# Altium PCB POKERKIDV1TESTBOARD.PcbDoc
Units mm, origin at the board's own origin, x right, y up, seen from the top; angles counter-clockwise.
Board outline 47.37 x 32.51 mm, 2 copper layers (Top Layer, Bottom Layer); 24 components, 14 nets, 76 pads, 0 vias.
Unrouted connection lines stored in the file: 2.
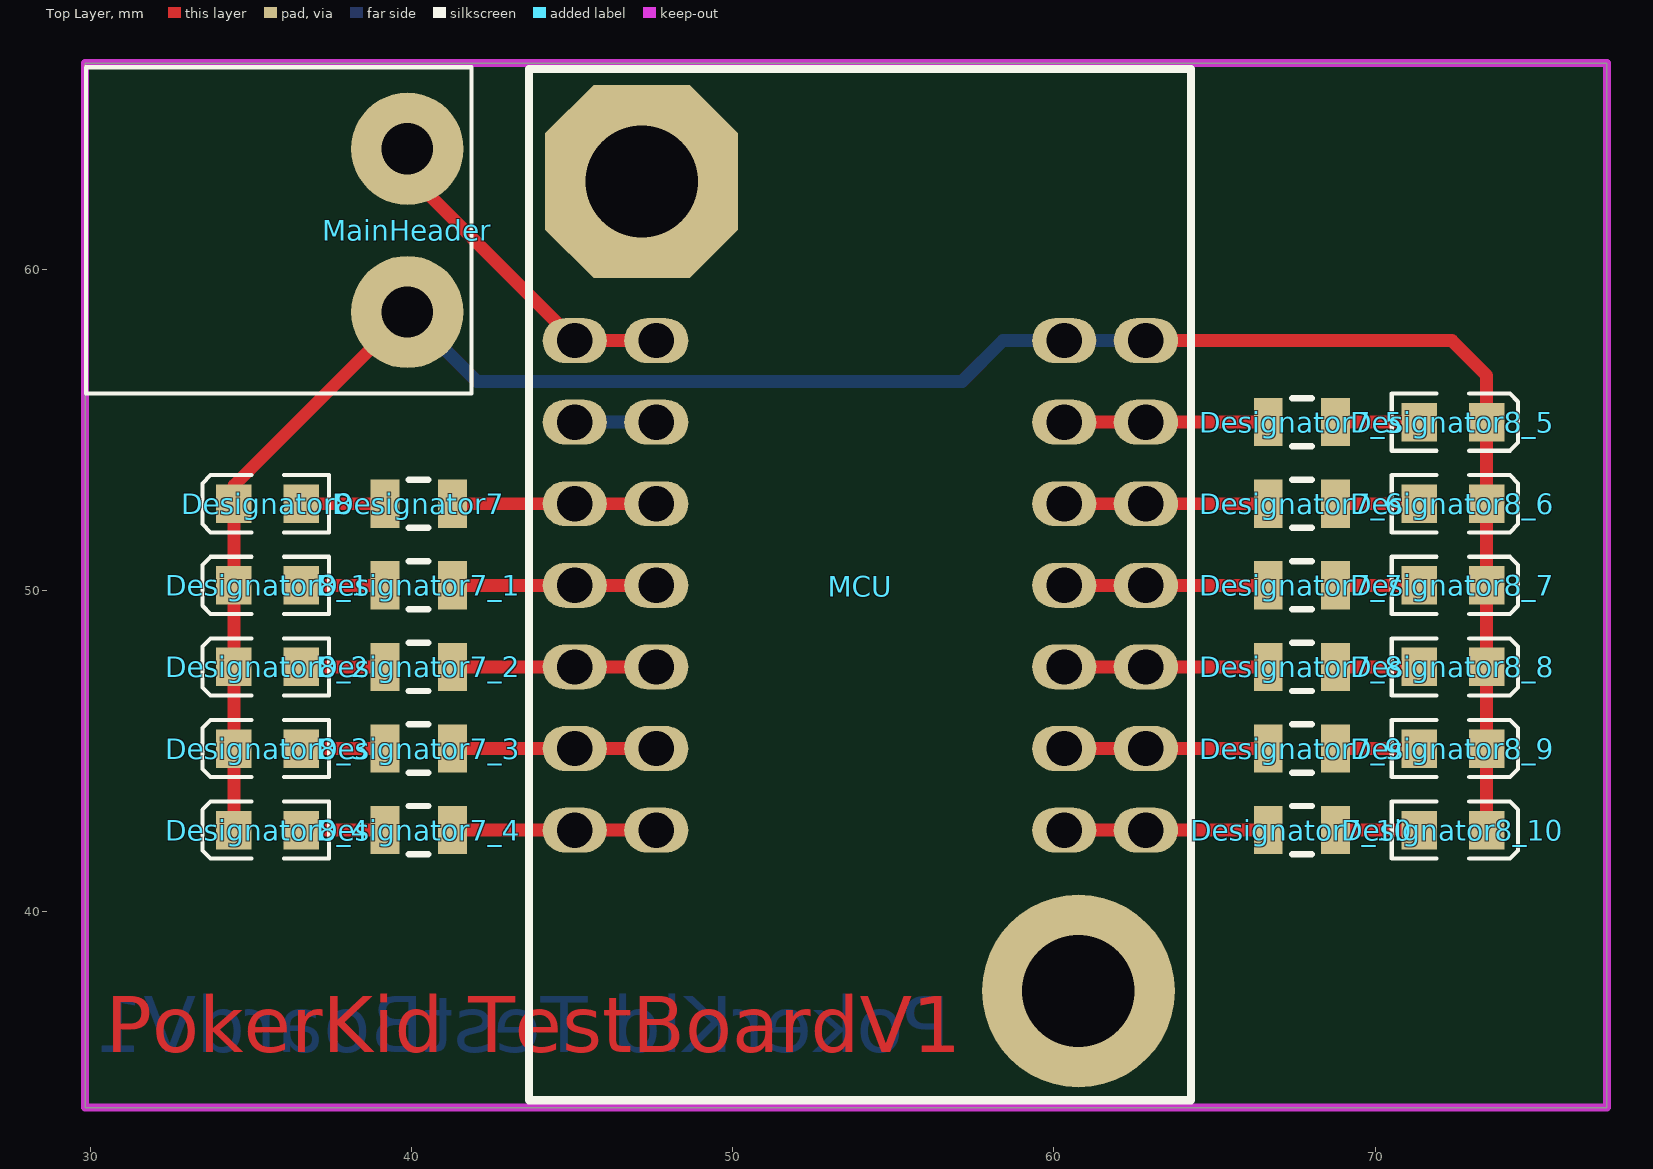
[diagram p0: Top Layer view]
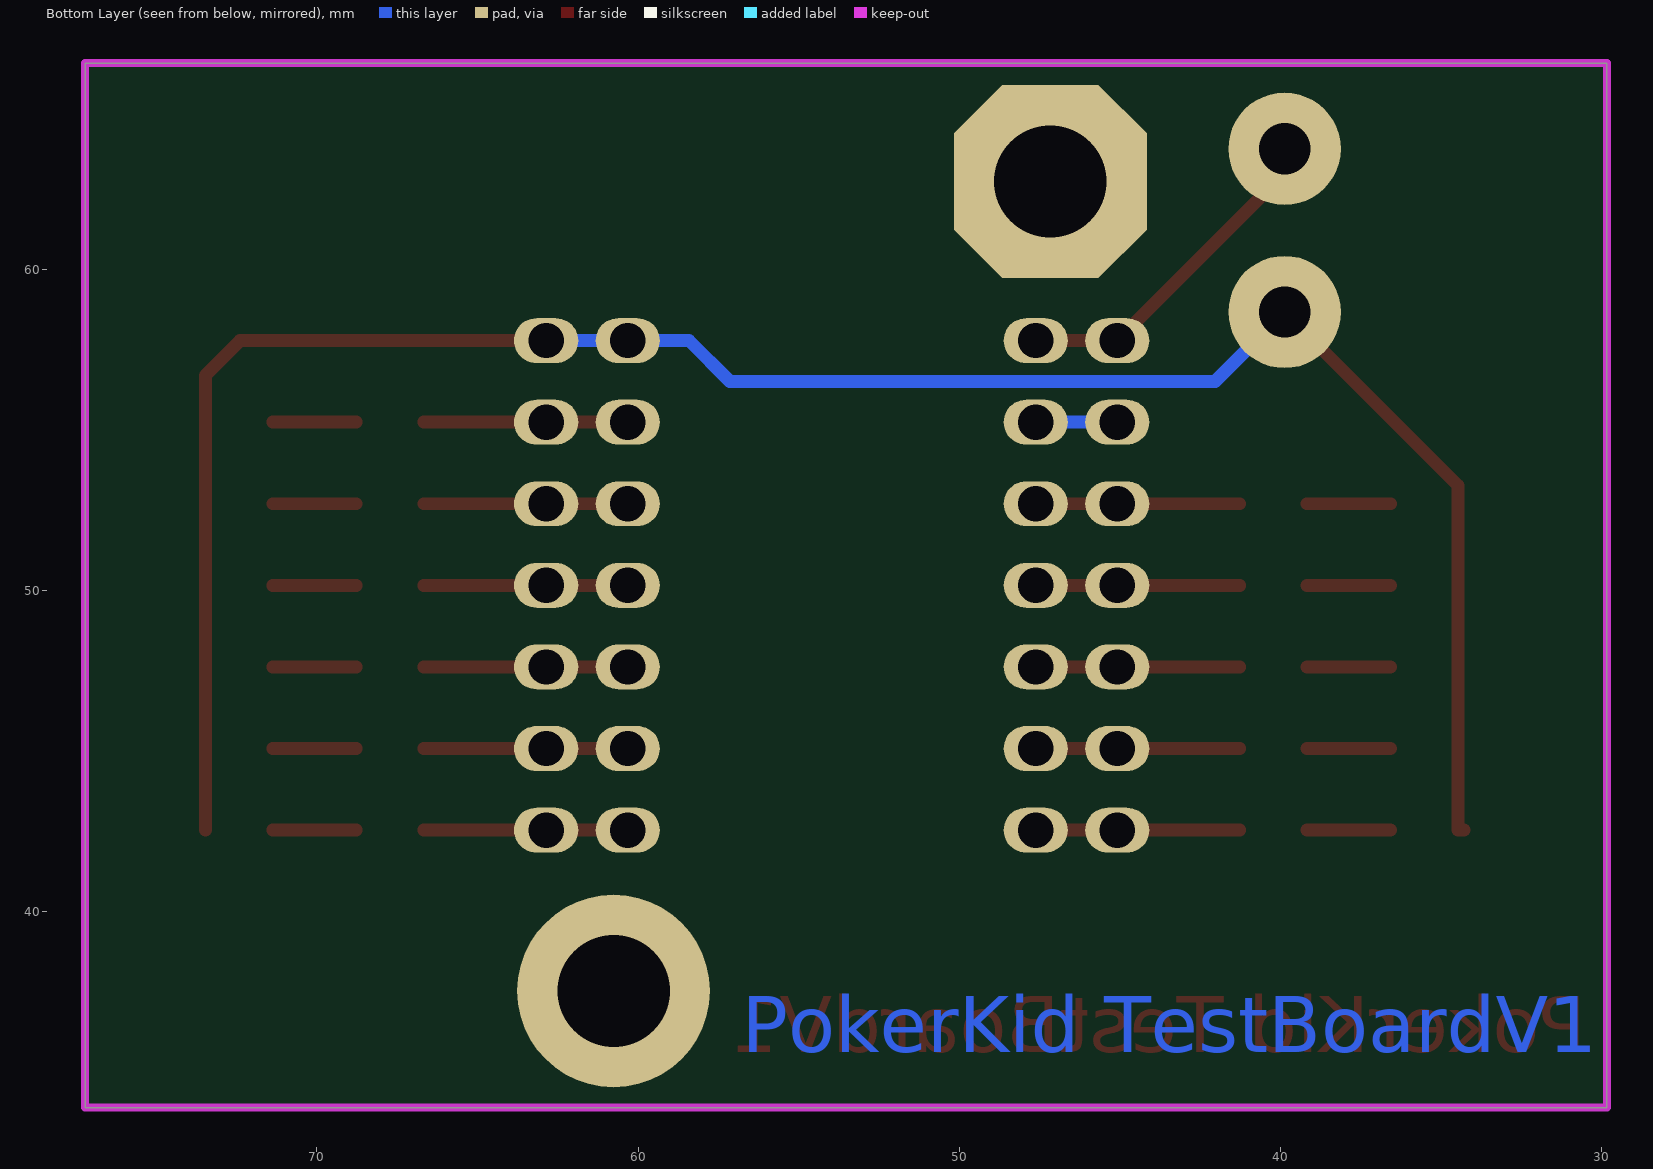
[diagram p1: Bottom Layer view, seen from below]

## Layer stack, top to bottom
Top Solder: solder mask 0.0102, Solder Resist, Dk 3.5
Top Layer: signal copper 0.0356
Dielectric 1: dielectric 0.32, FR-4, Dk 4.8
Bottom Layer: signal copper 0.0356
Bottom Solder: solder mask 0.0102, Solder Resist, Dk 3.5

## Board outline
29.845,33.909 77.216,33.909 77.216,66.421 29.845,66.421

## Design rules (kind name [scope] priority, off if disabled: settings)
Clearance [All] p1: gap=0.254 ignorepadtopadclearanceinfootprint=FALSE except(0: Arc-Hole Track-Hole SMDPad-Hole THPad-Hole Via-Hole Fill-Hole Poly-Hole Region-Hole Text-Hole)
PolygonConnect [All] p1: connectstyle=Relief reliefconductorwidth=0.254 reliefentries=4 polygonreliefangle="90 Angle" airgapwidth=0.254
RoutingVias [All] p1: holewidth=0.711 width=1.27 viastyle="Through Hole" minholewidth=0.711 minwidth=1.27 maxholewidth=0.711 maxwidth=1.27
SolderMaskExpansion [All] p1: expansion=0.102
Width [All] p1: maxlimit=0.4 minlimit=0.4 preferedwidth=0.4
30 further rules are at their usual default settings.

## Classes and differential pairs
component class POKERKIDV1TESTBOARD: MainHeader MCU

## Components (designator, comment, footprint, x,y, rotation, side; value= is the part's Value field where it differs from the comment)
Designator7 "Comment" "SMD 805" 40.225,52.705 r0 top
Designator7_1 "Comment" "SMD 805" 40.225,50.165 r0 top
Designator7_2 "Comment" "SMD 805" 40.225,47.625 r0 top
Designator7_3 "Comment" "SMD 805" 40.225,45.085 r0 top
Designator7_4 "Comment" "SMD 805" 40.225,42.545 r0 top
Designator7_5 "Comment" "SMD 805" 67.725,55.245 r180 top
Designator7_6 "Comment" "SMD 805" 67.725,52.705 r180 top
Designator7_7 "Comment" "SMD 805" 67.725,50.165 r180 top
Designator7_8 "Comment" "SMD 805" 67.725,47.625 r180 top
Designator7_9 "Comment" "SMD 805" 67.725,45.085 r180 top
Designator7_10 "Comment" "SMD 805" 67.725,42.545 r180 top
Designator8 "Comment" LED_0805_Blue 35.526,52.705 r180 top
Designator8_1 "Comment" LED_0805_Blue 35.526,50.165 r180 top
Designator8_2 "Comment" LED_0805_Blue 35.526,47.625 r180 top
Designator8_3 "Comment" LED_0805_Blue 35.526,45.085 r180 top
Designator8_4 "Comment" LED_0805_Blue 35.526,42.545 r180 top
Designator8_5 "Comment" LED_0805_Blue 72.424,55.245 r0 top
Designator8_6 "Comment" LED_0805_Blue 72.424,52.705 r0 top
Designator8_7 "Comment" LED_0805_Blue 72.424,50.165 r0 top
Designator8_8 "Comment" LED_0805_Blue 72.424,47.625 r0 top
Designator8_9 "Comment" LED_0805_Blue 72.424,45.085 r0 top
Designator8_10 "Comment" LED_0805_Blue 72.424,42.545 r0 top
MainHeader "691312510002" 691312510002 39.878,61.214 r270 top
MCU "MCU20-1" MCU20-1 43.667,66.237 r0 top

## Footprints (in the part's own frame and the unit in brackets; to place one, negate y for a bottom-side part, rotate by r counter-clockwise, add the part's x,y. Pads: shape width x height; smd on the part's side, far side on the other; paste and mask are expansions set on the pad)
691312510002 [mm] "5,08mm - PCB Headers - Horizontal - Opened ends - 02p"
  round 3.5 hole 1.6: 1(-2.54,0) 2(2.54,0)
  silkscreen extent -5.08,-10 5.08,2, body extent -5.08,-10 5.08,2, height 8.51
LED_0805_Blue [mm] "Chip LED, 2-Leads, Body 2.0x1.3mm, IPC Medium Density"
  rect 1.1x1.2 smd: 1(-1.05,0) 2(1.05,0)
  silkscreen extent -1.91,-0.89 2.03,0.89, body extent -1,-0.63 1,0.62, height 0.68
MCU20-1 [mm]
  oval 2x1.4 hole 1.1: 1(1.418,-8.452) 2(1.418,-10.992) 3(1.418,-13.532) 4(1.418,-16.072) 5(1.418,-18.612) 6(1.418,-21.152) 7(1.418,-23.692) 8(3.958,-23.692) 9(3.958,-21.152) 10(3.958,-18.612) 11(3.958,-16.072) 12(3.958,-13.532) 13(3.958,-10.992) 14(3.958,-8.452) 15(16.658,-8.452) 16(16.658,-10.992) 17(16.658,-13.532) 18(16.658,-16.072) 19(16.658,-18.612) 20(16.658,-21.152) 21(16.658,-23.692) 22(19.198,-23.692) 23(19.198,-21.152) 24(19.198,-18.612) 25(19.198,-16.072) 26(19.198,-13.532) 27(19.198,-10.992) 28(19.198,-8.452)
  oct 6x6 hole 3.5: 2(3.5,-3.5)
  round 6 hole 3.5: 2(17.1,-28.7)
  silkscreen extent 0,-32.1 20.6,0, body extent 0,-38.94 20.6,-0.18, height 15.31
"SMD 805" [mm]
  rect 0.9x1.5 smd: 1(1.05,0) 2(-1.05,0)
  silkscreen extent -0.3,-0.75 0.3,0.75, body extent -1,-0.62 1,0.63, height 0.78

## Part data
MainHeader: "WR-TBL Terminal Blocks Serie 312 – 5.08 mm", Manufacturer="Würth Elektronik eiSos GmbH", ComponentLink1 Description=Manufacturer, ComponentLink1URL=http://www.we-online.com, ComponentLink2 Description=Datasheet, ComponentLink2URL=http://katalog.we-online.de/em/datasheet/6913125100xx.pdf, Created by="Karrer Zheng", Created Date="31 March 2014", NoPins=02, partNo=691312510002

## Nets (pads, with @x,y where several pads share a name; then routed paths per layer and width w, separated by ;. In a path a pad name is that pad's centre, name@x,y a point inside that pad or via, vN(x,y) a via of type N, cw(c..) or ccw(c..) an arc to the next point about the centre after c; other vN are vias at no path point)
GND: MainHeader.2 MCU.15 MCU.28 | length 24.4
  Bottom Layer w0.4: MainHeader.2 42.037,56.515 57.15,56.515 58.42,57.785 MCU.15 MCU.28
NetMCU_2: MCU.2 MCU.13 | length 2.5
  Bottom Layer w0.4: MCU.2@45.085,55.245 MCU.13
NetMCU_3: Designator7.1 MCU.3 MCU.12 | length 6.3
  Top Layer w0.4: Designator7.1 MCU.3 MCU.12
NetMCU_4: Designator7_1.1 MCU.4 MCU.11 | length 6.3
  Top Layer w0.4: Designator7_1.1 MCU.4 MCU.11
NetMCU_5: Designator7_2.1 MCU.5 MCU.10 | length 6.3
  Top Layer w0.4: Designator7_2.1 MCU.5 MCU.10
NetMCU_6: Designator7_3.1 MCU.6 MCU.9 | length 6.3
  Top Layer w0.4: Designator7_3.1 MCU.6 MCU.9
NetMCU_7: Designator7_4.1 MCU.7 MCU.8 | length 6.3
  Top Layer w0.4: Designator7_4.1 MCU.7 MCU.8
NetMCU_16: Designator7_5.1 MCU.16 MCU.27 | length 6.3
  Top Layer w0.4: MCU.16 MCU.27 Designator7_5.1
NetMCU_17: Designator7_6.1 MCU.17 MCU.26 | length 6.3
  Top Layer w0.4: MCU.17 MCU.26 Designator7_6.1
NetMCU_18: Designator7_7.1 MCU.18 MCU.25 | length 6.3
  Top Layer w0.4: MCU.18 MCU.25 Designator7_7.1
NetMCU_19: Designator7_8.1 MCU.19 MCU.24 | length 6.3
  Top Layer w0.4: MCU.19 MCU.24 Designator7_8.1
NetMCU_20: Designator7_9.1 MCU.20 MCU.23 | length 6.3
  Top Layer w0.4: MCU.20 MCU.23 Designator7_9.1
NetMCU_21: Designator7_10.1 MCU.21 MCU.22 | length 6.3
  Top Layer w0.4: MCU.21 MCU.22 Designator7_10.1
VCC: MainHeader.1 MCU.1 MCU.14 | length 10.7
  Top Layer w0.4: MainHeader.1 39.878,62.992 MCU.1 MCU.14
pads on no net: Designator7.2 Designator7_1.2 Designator7_2.2 Designator7_3.2 Designator7_4.2 Designator7_5.2 Designator7_6.2 Designator7_7.2 Designator7_8.2 Designator7_9.2 Designator7_10.2 Designator8.1 Designator8.2 Designator8_1.1 Designator8_1.2 Designator8_2.1 Designator8_2.2 Designator8_3.1 Designator8_3.2 Designator8_4.1 Designator8_4.2 Designator8_5.1 Designator8_5.2 Designator8_6.1 Designator8_6.2 Designator8_7.1 Designator8_7.2 Designator8_8.1 Designator8_8.2 Designator8_9.1 Designator8_9.2 Designator8_10.1 Designator8_10.2
copper on no net: | length 72.5
  Top Layer w0.4: 34.29,42.545 34.476,42.545 34.476,52.705 34.476,53.272 39.878,58.674 ; 36.576,42.545 39.175,42.545 ; 36.576,45.085 39.175,45.085 ; 36.576,47.625 39.175,47.625 ; 36.576,50.165 39.175,50.165 ; 36.576,52.705 39.175,52.705 ; 62.865,57.785 70.934,57.785 72.39,57.785 73.474,56.701 73.474,55.118 ; 68.775,42.545 71.374,42.545 ; 68.775,45.085 71.374,45.085 ; 68.775,47.625 71.374,47.625 ; 68.775,50.165 71.374,50.165 ; 68.775,52.705 71.374,52.705 ; 68.775,55.245 71.374,55.245 ; 73.474,42.545 73.474,55.245

## Keep-outs
Keep-Out Layer:
  the board outline again, w0.254

## Other copper
Top Layer:
  text "PokerKid TestBoardV1" at 30.48,35.052 h3
Bottom Layer:
  text "PokerKid TestBoardV1" at 56.769,35.052 h3